# EAGLE board untitled (EAGLE 8.3.0)
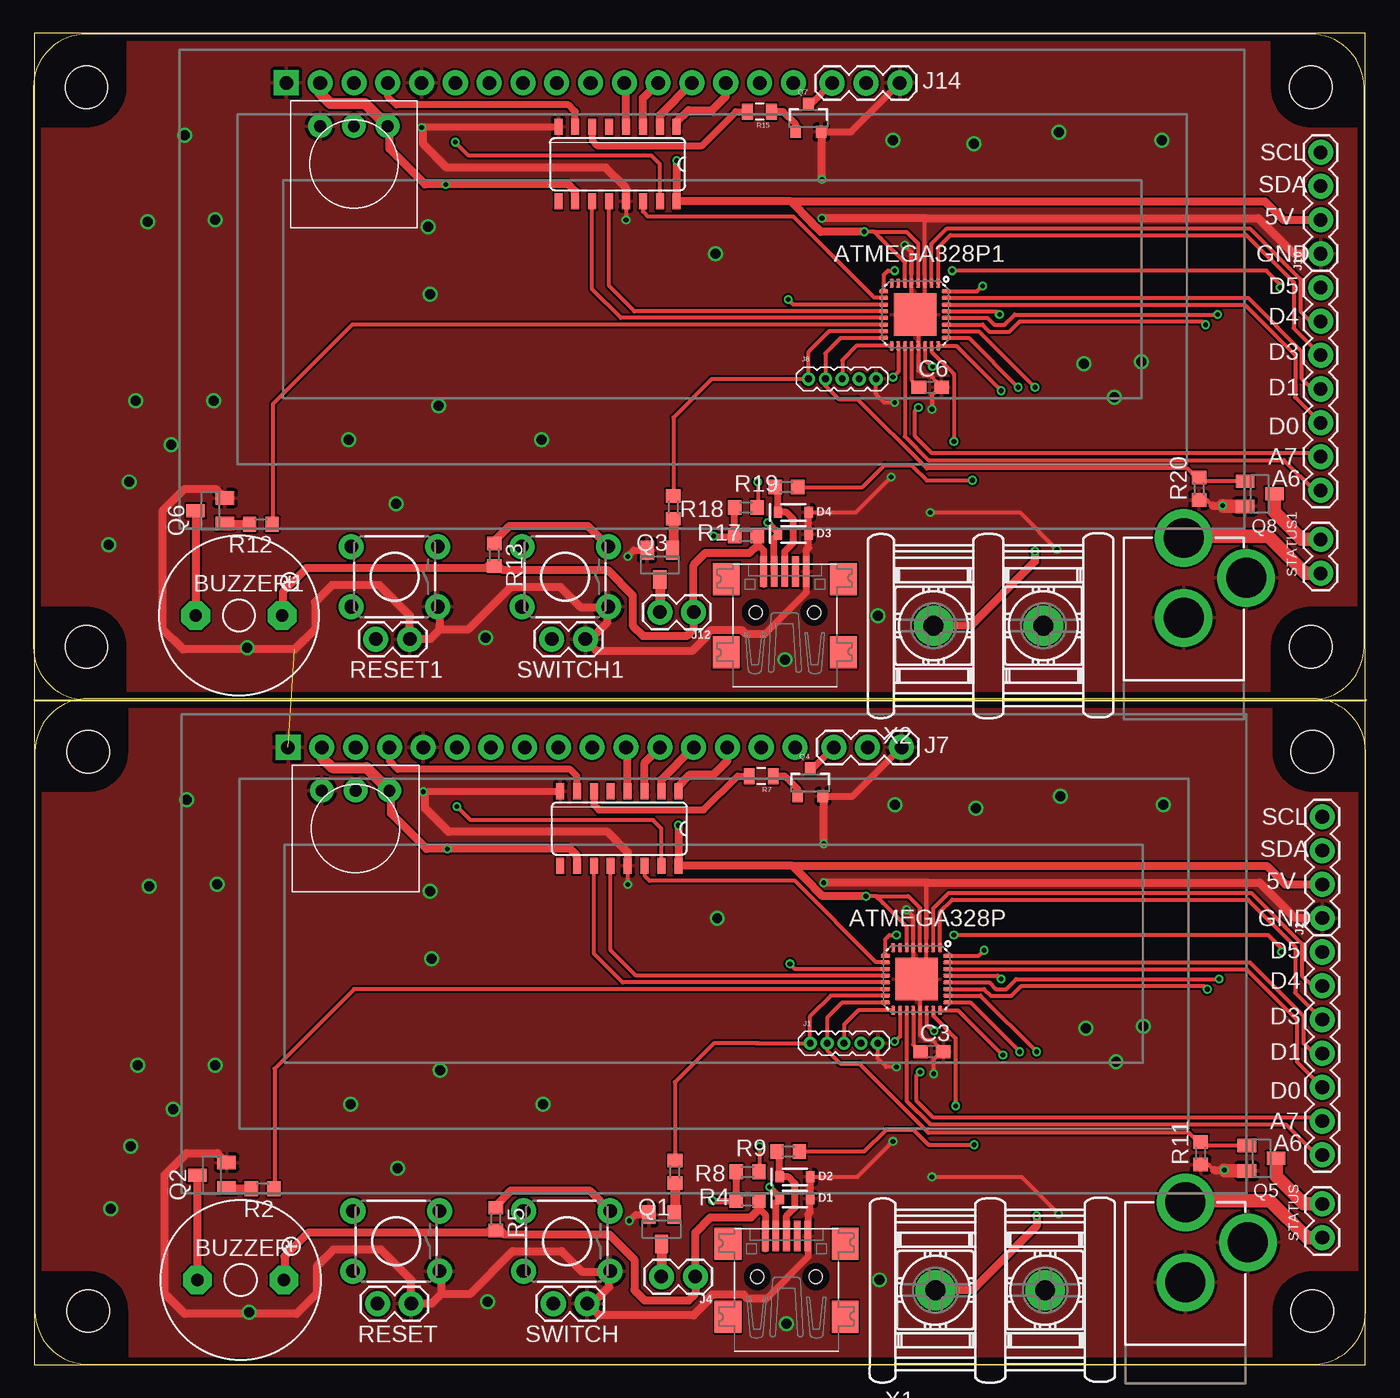
[diagram p0: board, top side]
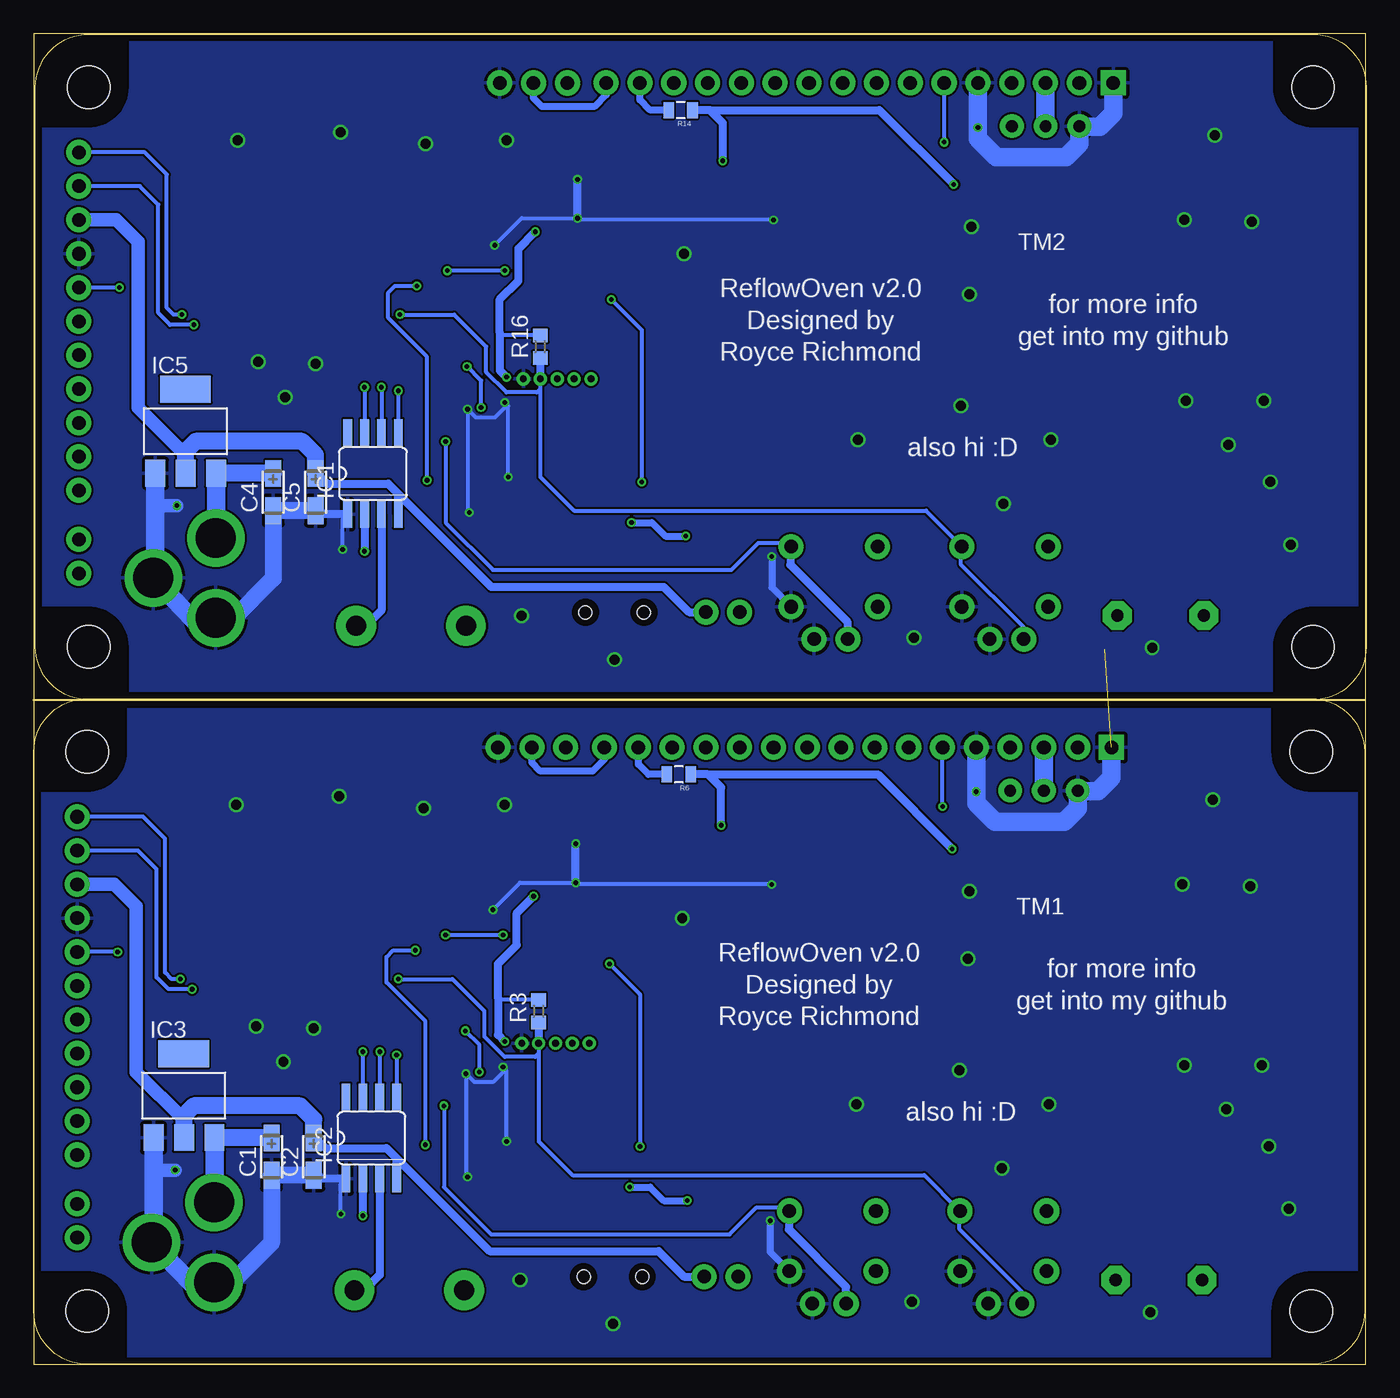
[diagram p1: board, bottom side, seen from below]

Size 100.16 x 100 mm. Coordinates in mm from the lower left corner, seen from the top.
Outline: 0.09,49.91 0.09,100 100.09,100 100.09,0 0.09,0 0.09,49.91
Outline: 0.09,49.91 100.16,49.91
Copper layers (1*16): Top 0.035mm / dielectric 1.6mm / Bottom 0.035mm
Design rules "Elecrow_2-layer_PCB_eagle_rule": minimum track width 6mil, minimum drill 12mil, track to track 6mil, track to pad 6mil, pad to pad 6mil, via to via 8mil, smd to smd 0mil, copper to edge 20mil, drill to drill 10mil, minimum pad ring 6mil, minimum via ring 6mil, stop-mask expansion 0mil, vias tented up to drill 100mil, thermal gap 10mil

## Footprints (pad centres in the part's own frame; a part is rotated, then mirrored left to right if it is on the bottom)
MLF32-PAD = smd 0.7 x 0.3: 1 -2.35,1.75; 2 -2.35,1.25; 3 -2.35,0.75; 4 -2.35,0.25; 5 -2.35,-0.25; 6 -2.35,-0.75; 7 -2.35,-1.25; 8 -2.35,-1.75; 17 2.35,-1.75; 18 2.35,-1.25; 19 2.35,-0.75; 20 2.35,-0.25; 21 2.35,0.25; 22 2.35,0.75; 23 2.35,1.25; 24 2.35,1.75 | smd 0.3 x 0.7: 9 -1.75,-2.35; 10 -1.25,-2.35; 11 -0.75,-2.35; 12 -0.25,-2.35; 13 0.25,-2.35; 14 0.75,-2.35; 15 1.25,-2.35; 16 1.75,-2.35; 25 1.75,2.35; 26 1.25,2.35; 27 0.75,2.35; 28 0.25,2.35; 29 -0.25,2.35; 30 -0.75,2.35; 31 -1.25,2.35; 32 -1.75,2.35 | smd 3.2 x 3.2: PAD 0,0
F/QMBIII = drill 0.914 pad 2.159 octagon: + 3.251,0; - -3.251,0
CT3216 = smd 2 x 1.2: + 1.4,0; - -1.4,0
C0603 = smd 1.1 x 1: 1 -0.85,0; 2 0.85,0
USB-MINIB = smd 0.5 x 2.308: D+ 0,4.064; D- -0.8,4.064; GND 1.6,4.064; ID 0.8,4.064; VBUS -1.6,4.064 | smd 2 x 2.4: GND1 -4.4,-2; GND2 -4.4,3.5; GND3 4.4,3.5; GND4 4.4,-2 | hole 1: -2.2,1; 2.2,1
SOD-323 = smd 0.63 x 0.83: A 1.15,0; C -1.15,0
SO08 = smd 0.66 x 2.032: 1 -1.905,-3.073; 2 -0.635,-3.073; 3 0.635,-3.073; 4 1.905,-3.073; 5 1.905,3.073; 6 0.635,3.073; 7 -0.635,3.073; 8 -1.905,3.073
SOT223 = smd 1.499 x 2.007: 1 -2.261,-3.15; 2 0.025,-3.15; 3 2.311,-3.15 | smd 3.81 x 2.007: 4 0,3.15
SO16 = smd 0.6 x 1.2: 1 -4.445,-2.8; 2 -3.175,-2.8; 3 -1.905,-2.8; 4 -0.635,-2.8; 5 0.635,-2.8; 6 1.905,-2.8; 7 3.175,-2.8; 8 4.445,-2.8; 9 4.445,2.8; 10 3.175,2.8; 11 1.905,2.8; 12 0.635,2.8; 13 -0.635,2.8; 14 -1.905,2.8; 15 -3.175,2.8; 16 -4.445,2.8
1X05-1.27MM = drill 0.508 pad 1: 1 0,0; 2 1.27,0; 3 2.54,0; 4 3.81,0; 5 5.08,0
1X04 = drill 1.016 pad 1.88: 1 0,0; 2 2.54,0; 3 5.08,0; 4 7.62,0
POWER_JACK_PTH = drill 2.997 pad 4.318: GND 0,7.7; GNDBREAK 4.7,10.7; PWR 0,13.7
1X02 = drill 1.016 pad 1.88: 1 0,0; 2 2.54,0
1X03 = drill 1.016 pad 1.88: 1 0,0; 2 2.54,0; 3 5.08,0
1X07 = drill 1.016 pad 1.88: 1 0,0; 2 2.54,0; 3 5.08,0; 4 7.62,0; 5 10.16,0; 6 12.7,0; 7 15.24,0
DP10050_V1 = hole 3.2: -46,-21; 46,-21; 46,21; -46,21
SOT23 = smd 1 x 1.4: 1 -0.95,-1.1; 2 0.95,-1.1; 3 0,1.1
SOT23-3 = smd 0.8 x 0.9: 1 -0.95,-1; 2 0.95,-1; 3 0,1.1
R0603 = smd 1 x 1.1: 1 -0.85,0; 2 0.85,0
0805 = smd 0.8 x 1.2: 1 -0.9,0; 2 0.9,0
TACTILE_SWITCH_PTH_6.0MM = drill 1.016 pad 1.88: 1 -3.251,2.261; 2 3.251,2.261; 3 -3.251,-2.261; 4 3.251,-2.261
TRIM-3386 = drill 0.9 pad 1.778: 1 -2.54,-2.857; 2 0,-2.857; 3 2.54,-2.857
LCD-16X2_NOHOLES = drill 1.016 pad 1.88 square: 1 -32,15.5 | drill 1.016 pad 1.88: 2 -29.46,15.5; 3 -26.92,15.5; 4 -24.38,15.5; 5 -21.84,15.5; 6 -19.3,15.5; 7 -16.76,15.5; 8 -14.22,15.5; 9 -11.68,15.5; 10 -9.14,15.5; 11 -6.6,15.5; 12 -4.06,15.5; 13 -1.52,15.5; 14 1.02,15.5; 15 3.56,15.5; 16 6.1,15.5
5202-02-N-02 = drill 1.5 pad 3: 1 -8.25,0; 2 0,0

## Placement (x,y rotation side)
ATMEGA328P  [MLF32-PAD]  66.38,28.96 270 top
ATMEGA328P1  [MLF32-PAD]  66.26,78.87 270 top
BUZZER  F/QMBIII  [F/QMBIII]  15.58,6.35 0 top
BUZZER1  F/QMBIII  [F/QMBIII]  15.46,56.26 0 top
C1  10uF  [CT3216]  82.26,15.62 90 bottom
C2  10uF  [CT3216]  79.08,15.62 90 bottom
C3  [C0603]  67.53,23.5 0 top
C4  10uF  [CT3216]  82.13,65.53 90 bottom
C5  10uF  [CT3216]  78.96,65.53 90 bottom
C6  [C0603]  67.4,73.41 0 top
CN1  [USB-MINIB]  56.6,5.59 0 top
CN2  [USB-MINIB]  56.48,55.5 0 top
D1  3.6V  [SOD-323]  57.24,12.45 0 top
D2  3.6V  [SOD-323]  57.24,14.1 0 top
D3  3.6V  [SOD-323]  57.11,62.36 0 top
D4  3.6V  [SOD-323]  57.11,64.01 0 top
IC1  MAX6675  [SO08]  74.64,66.93 0 bottom
IC2  MAX6675  [SO08]  74.77,17.02 0 bottom
IC3  REG1117  [SOT223]  88.86,20.19 0 bottom
IC4  74LS595D  [SO16]  44.03,40.26 180 top
IC5  REG1117  [SOT223]  88.73,70.1 0 bottom
IC6  74LS595D  [SO16]  43.9,90.17 180 top
J1  [1X05-1.27MM]  58.38,24.13 0 top
J2  [1X04]  96.86,33.53 90 top
J3  POWER_JACK  [POWER_JACK_PTH]  86.58,-1.52 0 top
J4  [1X02]  49.75,6.6 180 top
J5  [1X02]  25.87,4.57 0 top
J6  [1X02]  39.08,4.57 0 top
J7  [1X03]  65.24,46.35 180 top
J8  [1X05-1.27MM]  58.25,74.04 0 top
J9  [1X07]  96.86,15.75 90 top
J10  [1X04]  96.74,83.44 90 top
J11  POWER_JACK  [POWER_JACK_PTH]  86.45,48.39 0 top
J12  [1X02]  49.62,56.52 180 top
J13  [1X02]  38.95,54.48 0 top
J14  [1X03]  65.11,96.27 180 top
J15  [1X02]  25.74,54.48 0 top
J16  [1X07]  96.74,65.66 90 top
PCB1  PCB_DP_RECTANGLE-50X100  [DP10050_V1]  50.13,25.02 0 top
PCB2  PCB_DP_RECTANGLE-50X100  [DP10050_V1]  50,74.93 0 top
Q1  [SOT23]  47.21,10.16 180 top
Q2  [SOT23]  13.42,14.22 90 top
Q3  [SOT23]  47.08,60.07 180 top
Q4  MMBT2222A  [SOT23-3]  58.38,43.69 0 top
Q5  [SOT23]  92.29,15.49 270 top
Q6  [SOT23]  13.3,64.14 90 top
Q7  MMBT2222A  [SOT23-3]  58.25,93.6 0 top
Q8  [SOT23]  92.16,65.41 270 top
R1  330  [R0603]  48.22,14.48 270 top
R2  330  [R0603]  17.23,13.21 180 top
R3  10k  [R0603]  62.19,26.54 90 bottom
R4  1.5K  [R0603]  53.68,12.32 0 top
R5  10k  [R0603]  34.76,10.92 270 top
R6  330  [0805]  51.65,44.32 180 bottom
R7  1K  [0805]  54.7,44.2 180 top
R8  68  [R0603]  53.68,14.48 180 top
R9  68  [R0603]  56.73,16 180 top
R10  330  [R0603]  48.09,64.39 270 top
R11  10k  [R0603]  87.72,15.88 90 top
R12  330  [R0603]  17.11,63.12 180 top
R13  10k  [R0603]  34.63,60.83 270 top
R14  330  [0805]  51.52,94.23 180 bottom
R15  1K  [0805]  54.57,94.11 180 top
R16  10k  [R0603]  62.06,76.45 90 bottom
R17  1.5K  [R0603]  53.56,62.23 0 top
R18  68  [R0603]  53.56,64.39 180 top
R19  68  [R0603]  56.6,65.91 180 top
R20  10k  [R0603]  87.59,65.79 90 top
RESET  MOMENTARY-SWITCH-SPST-PTH-6.0MM  [TACTILE_SWITCH_PTH_6.0MM]  27.27,9.27 180 top
RESET1  MOMENTARY-SWITCH-SPST-PTH-6.0MM  [TACTILE_SWITCH_PTH_6.0MM]  27.14,59.18 180 top
STATUS  [1X02]  96.86,9.53 90 top
STATUS1  [1X02]  96.74,59.44 90 top
SWITCH  MOMENTARY-SWITCH-SPST-PTH-6.0MM  [TACTILE_SWITCH_PTH_6.0MM]  40.09,9.27 180 top
SWITCH1  MOMENTARY-SWITCH-SPST-PTH-6.0MM  [TACTILE_SWITCH_PTH_6.0MM]  39.97,59.18 180 top
TM1  [TRIM-3386]  24.22,40.26 180 top
TM2  [TRIM-3386]  24.09,90.17 180 top
U1  LCD-16X2NOHOLES  [LCD-16X2_NOHOLES]  51.02,80.77 0 top
U3  LCD-16X2NOHOLES  [LCD-16X2_NOHOLES]  51.14,30.86 0 top
X1  5202-02-N-02  [5202-02-N-02]  76.03,5.59 0 top
X2  5202-02-N-02  [5202-02-N-02]  75.91,55.5 0 top

## Library data of the parts
ATMEGA328P ATMEGA328P1 = SparkFun-DigitalIC
BUZZER BUZZER1 = buzzer; OC_FARNELL: unknown; OC_NEWARK: unknown
C1-C6 CN1 CN2 IC1 IC2 Q5 Q8 R1-R5 R8-R13 R16-R20 TM1 TM2 = adafruit
D1-D4 = SparkFun-DiscreteSemi; PROD_ID: DIO-08199
IC3 IC5 = burr-brown; MPN: REG1117; OC_FARNELL: 1097566; OC_NEWARK: 14P6981
IC4 IC6 = SparkFun-DigitalIC; PROD_ID: IC-07875
J1 J8 = Rheyd
J2 J4-J7 J9 J10 J12-J16 STATUS STATUS1 = SparkFun-Connectors
J3 J11 = SparkFun-Connectors; PROD_ID: CONN-08197
PCB1 PCB2 = dp_devices; PCB_SIZE: DP10050_V1
Q1-Q3 Q6 = semicon-smd-ipc
Q4 Q7 = SparkFun-DiscreteSemi; PROD_ID: TRANS-08049
R6 R7 R14 R15 = SparkFun-Resistors; PROD_ID: RES-11622
RESET RESET1 SWITCH SWITCH1 = SparkFun-Switches; PROD_ID: SWCH-08441; SF_SKU: COM-00097
U1 U3 = SparkFun-Displays
X1 X2 = con-ebyelectro

## Nets
+5V: ATMEGA328P.4 ATMEGA328P.6 ATMEGA328P.18 BUZZER.+ C2.+ CN1.VBUS IC2.4 IC3.2 IC4.10 IC4.16 J2.2 J4.1 R3.2 R4.2 R5.2 R6.1 TM1.1 U3.2
+5V1: ATMEGA328P1.4 ATMEGA328P1.6 ATMEGA328P1.18 BUZZER1.+ C5.+ CN2.VBUS IC1.4 IC5.2 IC6.10 IC6.16 J10.2 J12.1 R13.2 R14.1 R16.2 R17.2 TM2.1 U1.2
+12V: C1.+ IC3.3 J3.PWR STATUS.1
+12V1: C4.+ IC5.3 J11.PWR STATUS1.1
A1: ATMEGA328P1.19 J16.1
A2: ATMEGA328P1.22 J16.2
A6: ATMEGA328P.19 J9.1
A7: ATMEGA328P.22 J9.2
BUZZER: ATMEGA328P.14 R2.1
BUZZER1: ATMEGA328P1.14 R12.1
CLK: ATMEGA328P.24 IC2.5
CLK1: ATMEGA328P1.24 IC1.5
CLOCK: ATMEGA328P.13 IC4.11
CLOCK1: ATMEGA328P1.13 IC6.11
CS: ATMEGA328P.25 IC2.6
CS1: ATMEGA328P1.25 IC1.6
D1: ATMEGA328P1.17 J8.3
D2: ATMEGA328P.32 R9.1
D3: ATMEGA328P.1 J9.5
D4: ATMEGA328P.2 J9.6
D5: ATMEGA328P.9 J9.7
D6: ATMEGA328P1.11 R18.1
D7: ATMEGA328P.11 R8.1
D8: ATMEGA328P1.9 J16.7
D9: ATMEGA328P1.2 J16.6
D10: ATMEGA328P1.1 J16.5
D11: ATMEGA328P1.32 R19.1
D13: ATMEGA328P.17 J1.3
DATA: ATMEGA328P.10 IC4.14
DATA1: ATMEGA328P1.10 IC6.14
GND: ATMEGA328P1.3 ATMEGA328P1.5 ATMEGA328P1.21 ATMEGA328P1.PAD ATMEGA328P.3 ATMEGA328P.5 ATMEGA328P.21 ATMEGA328P.PAD C1.- C2.- C3.2 C4.- C5.- C6.2 CN1.GND CN2.GND D1.A D2.A D3.A D4.A IC1.1 IC2.1 IC3.1 IC4.8 IC4.13 IC5.1 IC6.8 IC6.13 J1.5 J2.1 J3.GND J3.GNDBREAK J5.2 J6.2 J7.1 J8.5 J10.1 J11.GND J11.GNDBREAK J13.2 J14.1 J15.2 Q1.2 Q2.2 Q3.2 Q4.2 Q5.2 Q6.2 Q7.2 Q8.2 R11.1 R20.1 RESET1.1 RESET.1 SWITCH1.1 SWITCH.1 TM1.3 TM2.3 U1.1 U1.5 U3.1 U3.5
LATCH: ATMEGA328P.12 IC4.12
LATCH1: ATMEGA328P1.12 IC6.12
N$1: BUZZER.- Q2.3
N$2: IC2.2 X1.1
N$3: IC2.3 X1.2
N$4: Q1.1 R1.2
N$5: Q2.1 R2.2
N$6: ATMEGA328P.20 C3.1
N$7: J4.2 Q1.3
N$8: R6.2 U3.15
N$9: TM1.2 U3.3
N$10: IC4.7 U3.4
N$11: IC4.15 U3.6
N$12: IC4.4 U3.11
N$13: IC4.3 U3.12
N$14: IC4.2 U3.13
N$15: IC4.1 U3.14
N$16: J7.2 U3.16
N$17: J7.3 Q4.3
N$18: Q4.1 R7.1
N$19: IC4.6 R7.2
N$20: CN1.D- D1.C R4.1 R8.2
N$21: CN1.D+ D2.C R9.2
N$22: BUZZER1.- Q6.3
N$23: IC1.2 X2.1
N$24: Q5.3 STATUS.2
N$25: IC1.3 X2.2
N$26: Q3.1 R10.2
N$27: Q6.1 R12.2
N$28: J12.2 Q3.3
N$29: R14.2 U1.15
N$30: TM2.2 U1.3
N$31: IC6.7 U1.4
N$32: IC6.15 U1.6
N$33: IC6.4 U1.11
N$34: IC6.3 U1.12
N$35: IC6.2 U1.13
N$36: IC6.1 U1.14
N$37: J14.2 U1.16
N$38: J14.3 Q7.3
N$39: Q7.1 R15.1
N$40: IC6.6 R15.2
N$41: ATMEGA328P1.20 C6.1
N$42: CN2.D- D3.C R17.1 R18.2
N$43: CN2.D+ D4.C R19.2
N$44: Q8.3 STATUS1.2
RESET: ATMEGA328P.29 J1.4 J5.1 R3.1 RESET.3
RESET1: ATMEGA328P1.29 J8.4 J15.1 R16.1 RESET1.3
RXD: ATMEGA328P.30 J9.3
RXD1: ATMEGA328P1.30 J16.3
SCL: ATMEGA328P.28 J2.4
SCL1: ATMEGA328P1.28 J10.4
SDA: ATMEGA328P.27 J2.3
SDA1: ATMEGA328P1.27 J10.3
SO: ATMEGA328P.26 IC2.7
SO1: ATMEGA328P1.26 IC1.7
SSR: ATMEGA328P.15 J1.1 R1.1
SSR1: ATMEGA328P1.15 J8.1 R10.1
STATUS: ATMEGA328P.16 J1.2 Q5.1 R11.2
STATUS1: ATMEGA328P1.16 J8.2 Q8.1 R20.2
SWITCH: ATMEGA328P.23 J6.1 R5.1 SWITCH.3
SWITCH1: ATMEGA328P1.23 J13.1 R13.1 SWITCH1.3
TXD: ATMEGA328P.31 J9.4
TXD1: ATMEGA328P1.31 J16.4

## Tracks (layer width: path | path; a pad name or v marks a point on that pad's centre or on a via)
+5V  (via drill 0.35)
  Top 0.305: 63.32,35.18 65.75,35.18 66.63,34.29 ATMEGA328P.4 | 63.32,35.18 v62.57,35.18 | ATMEGA328P.6 65.63,32.88 63.84,34.67 63.83,34.67 63.32,35.18 | ATMEGA328P.18 65.13,24.66 v64.73,24.26 | 57.49,36.96 57.49,37.03 57.06,37.46
  Top 0.508: R4.2 54.57,12.28 54.57,11.68 55,11.25 CN1.VBUS 55,8.69 | 49.96,6.6 49.75,6.39
  Top 0.61: IC4.10 40.86,38.23 40.35,38.73 v31.12,38.73 29.55,38.73 26.89,41.4 26.89,42.99 TM1.1 | v48.48,40.51 IC4.16 57.06,37.46 | 57.06,37.46 92.68,37.46 94.07,36.07 J2.2 | BUZZER.+ 18.88,6.4 18.88,8.13 20.66,9.91 34.12,9.91 34.29,10.07 R5.2 35.1,10.07 35.39,9.78 43.27,9.78 45.17,7.87 45.17,5.59 45.94,4.83 49.24,4.83 49.75,5.33 49.75,6.39 J4.1 49.75,9.91 50.89,11.05 53.94,11.05 54.57,11.68 | 57.06,37.46 58.61,35.91 58.61,35.87 59.3,35.18 v62.57,35.18
  Top 0.813: U3.2 21.68,45.59 22.44,44.83 25.04,44.83 TM1.1
  Bottom 0.305: R3.2 65.05,27.39 65.24,27.58
  Bottom 0.61: 49.45,44.32 R6.1 | 49.45,44.32 36.71,44.32 v31.12,38.73 | v48.48,40.51 48.48,43.35 49.45,44.32 | 72.86,15.24 IC2.4 72.86,15.49 | C2.+ 78.7,16.64 78.58,16.64 78.19,16.26 73.62,16.26 72.86,15.49 | v64.73,24.26 65.24,24.77 65.24,27.58 65.24,30.1 63.84,31.5 63.84,33.91 v62.57,35.18 | 72.86,15.49 65.88,8.51 53.17,8.51 51.27,6.6 J4.1
  Bottom 1.016: IC3.2 88.84,18.39 92.42,21.97 92.42,34.42 94.07,36.07 J2.2
  Bottom 1.27: C2.+ 79.08,18.41 80.1,19.43 88.1,19.43 88.86,18.67 88.86,17.07 IC3.2
+5V1  (via drill 0.35)
  Top 0.305: 63.2,85.09 65.62,85.09 66.51,84.2 ATMEGA328P1.4 | 63.2,85.09 v62.45,85.09 | ATMEGA328P1.6 65.51,82.79 63.72,84.58 63.7,84.58 63.2,85.09 | ATMEGA328P1.18 65.01,74.57 v64.61,74.17 | 57.37,86.87 57.37,86.94 56.93,87.37
  Top 0.508: R17.2 54.45,62.19 54.45,61.59 54.88,61.16 CN2.VBUS 54.88,58.6 | 49.83,56.52 49.62,56.3
  Top 0.61: IC6.10 40.73,88.14 40.22,88.65 v30.99,88.65 29.43,88.65 26.76,91.31 26.76,92.9 TM2.1 | v48.35,90.42 IC6.16 56.93,87.37 | 56.93,87.37 92.55,87.37 93.94,85.98 J10.2 | BUZZER1.+ 18.76,56.31 18.76,58.04 20.54,59.82 34,59.82 34.16,59.98 R13.2 34.98,59.98 35.27,59.69 43.14,59.69 45.05,57.78 45.05,55.5 45.81,54.74 49.11,54.74 49.62,55.24 49.62,56.3 J12.1 49.62,60.07 50.51,60.96 53.81,60.96 54.45,61.59 | 56.93,87.37 58.49,85.82 58.49,85.78 59.18,85.09 v62.45,85.09
  Top 0.813: U1.2 21.56,95.5 22.31,94.74 24.92,94.74 TM2.1
  Bottom 0.305: R16.2 64.92,77.3 65.11,77.49
  Bottom 0.61: 49.32,94.23 R14.1 | 49.32,94.23 36.58,94.23 v30.99,88.65 | v48.35,90.42 48.35,93.26 49.32,94.23 | 72.73,65.15 IC1.4 72.73,65.41 | C5.+ 78.57,66.55 78.45,66.55 78.07,66.17 73.5,66.17 72.73,65.41 | v64.61,74.17 65.11,74.68 65.11,77.49 65.11,80.01 63.72,81.41 63.72,83.82 v62.45,85.09 | 72.73,65.41 65.75,58.42 52.79,58.42 50.89,56.52 J12.1
  Bottom 1.016: IC5.2 88.71,68.3 92.29,71.88 92.29,84.33 93.94,85.98 J10.2
  Bottom 1.27: C5.+ 78.96,68.33 79.97,69.34 87.97,69.34 88.73,68.58 88.73,66.98 IC5.2
+12V
  Top 1.016: STATUS.1 95.72,9.53 92.93,12.32 86.85,12.32 J3.PWR
  Bottom 1.27: C1.+ 86.53,17.02 IC3.3
  Bottom 1.397: IC3.3 86.55,12.07 J3.PWR
+12V1
  Top 1.016: STATUS1.1 95.59,59.44 92.8,62.23 86.72,62.23 J11.PWR
  Bottom 1.27: C4.+ 86.4,66.93 IC5.3
  Bottom 1.397: IC5.3 86.42,61.98 J11.PWR
A1
  Top 0.305: J16.1 96.27,65.66 93.98,67.94 67.27,67.94 65.49,69.72 65.49,76.5 ATMEGA328P1.19
A2  (via drill 0.35)
  Top 0.305: J16.2 96.74,68.33 96.61,68.45 67.53,68.45 66.26,69.72 66.26,71.63 v66.51,71.88 | v67.57,74.98 67.48,74.98 67.01,75.45 ATMEGA328P1.22
  Bottom 0.305: v66.51,71.88 66.51,73.91 v67.57,74.98
A6
  Top 0.305: J9.1 96.39,15.75 94.11,18.03 67.4,18.03 65.62,19.81 65.62,26.59 ATMEGA328P.19
A7  (via drill 0.35)
  Top 0.305: J9.2 96.86,18.41 96.74,18.54 67.65,18.54 66.38,19.81 66.38,21.72 v66.64,21.97 | v67.7,25.07 67.61,25.07 67.13,25.54 ATMEGA328P.22
  Bottom 0.305: v66.64,21.97 66.64,24 v67.7,25.07
BUZZER
  Top 0.305: ATMEGA328P.14 24.1,28.21 18.12,22.23 18.12,13.25 R2.1
BUZZER1
  Top 0.305: ATMEGA328P1.14 23.98,78.12 18,72.14 18,63.16 R12.1
CLK  (via drill 0.35)
  Top 0.305: ATMEGA328P.24 69.5,26.61 v72.86,23.24
  Bottom 0.305: v72.86,23.24 IC2.5
CLK1  (via drill 0.35)
  Top 0.305: ATMEGA328P1.24 69.37,76.52 v72.73,73.15
  Bottom 0.305: v72.73,73.15 IC1.5
CLOCK
  Top 0.305: ATMEGA328P.13 44.28,28.71 42.13,30.86 IC4.11
CLOCK1
  Top 0.305: ATMEGA328P1.13 44.15,78.62 42,80.77 IC6.11
CS  (via drill 0.35)
  Top 0.305: ATMEGA328P.25 70.42,27.21 v74.13,23.5
  Bottom 0.305: v74.13,23.5 IC2.6
CS1  (via drill 0.35)
  Top 0.305: ATMEGA328P1.25 70.29,77.12 v74,73.41
  Bottom 0.305: v74,73.41 IC1.6
D1
  Top 0.305: ATMEGA328P1.17 61.87,76.52 60.8,75.44 J8.3
D2  (via drill 0.35)
  Top 0.305: ATMEGA328P.32 71.05,30.71 v71.46,31.11 | R9.1 62.45,16 64.1,17.65 66.13,17.65 67.27,16.51 v70.7,16.51
  Bottom 0.305: v70.7,16.51 70.7,25.78 73.62,28.7 73.62,30.61 73.11,31.11 v71.46,31.11
D3
  Top 0.305: ATMEGA328P.1 68.13,34.01 69.05,34.92 91.28,34.92 94.83,31.37 94.83,27.94 J9.5 96.48,25.91
D4
  Top 0.305: ATMEGA328P.2 67.63,34.27 68.8,35.43 91.53,35.43 95.34,31.62 95.34,29.21 96.1,28.45 J9.6
D5  (via drill 0.35)
  Top 0.305: ATMEGA328P.9 64.03,31.94 64.35,32.26 v64.86,32.26 | v93.81,30.99 93.81,31.24 92.8,32.26 v69.18,32.26
  Bottom 0.305: v64.86,32.26 v69.18,32.26 | v93.81,30.99 J9.7
D6  (via drill 0.35)
  Top 0.305: ATMEGA328P1.11 57.12,79.62 v56.73,80.01 | v54.45,66.29 54.45,64.43 R18.1
  Bottom 0.305: v54.45,66.29 54.45,77.72 v56.73,80.01
D7  (via drill 0.35)
  Top 0.305: ATMEGA328P.11 57.25,29.71 v56.86,30.1 | v54.57,16.38 54.57,14.52 R8.1
  Bottom 0.305: v54.57,16.38 54.57,27.81 v56.86,30.1
D8  (via drill 0.35)
  Top 0.305: ATMEGA328P1.9 63.91,81.85 64.22,82.17 v64.73,82.17 | v93.69,80.9 93.69,81.15 92.67,82.17 v69.05,82.17
  Bottom 0.305: v64.73,82.17 v69.05,82.17 | v93.69,80.9 J16.7
D9
  Top 0.305: ATMEGA328P1.2 67.51,84.18 68.67,85.34 91.4,85.34 95.21,81.53 95.21,79.12 95.97,78.36 J16.6
D10
  Top 0.305: ATMEGA328P1.1 68.01,83.92 68.92,84.84 91.15,84.84 94.7,81.28 94.7,77.85 J16.5 96.36,75.82
D11  (via drill 0.35)
  Top 0.305: ATMEGA328P1.32 70.93,80.62 v71.34,81.03 | R19.1 62.32,65.91 63.97,67.56 66,67.56 67.14,66.42 v70.57,66.42
  Bottom 0.305: v70.57,66.42 70.57,75.69 73.5,78.61 73.5,80.52 72.99,81.03 v71.34,81.03
D13
  Top 0.305: ATMEGA328P.17 62,26.61 60.92,25.53 J1.3
DATA
  Top 0.305: IC4.14 45.94,36.7 46.32,36.32 57.24,36.32 63.34,30.23 64.01,30.23 ATMEGA328P.10
DATA1
  Top 0.305: IC6.14 45.81,86.61 46.19,86.23 57.11,86.23 63.21,80.14 63.89,80.14 ATMEGA328P1.10
GND  (via drill 0.35, 0.75)  (1 unrouted)
  Top 0.305: 66.63,28.71 ATMEGA328P.21 66.63,24.77 67.02,24.38 67.53,24.38 68.03,23.88 68.03,23.84 68.32,23.55 | 66.63,28.71 ATMEGA328P.PAD 66.13,29.21 ATMEGA328P.5 66.13,33.65 v65.62,34.16 | 66.63,28.71 67.13,29.21 ATMEGA328P.3 67.13,36.15 67.18,36.2 | 68.32,23.55 C3.2 | v67.65,21.84 67.65,22.89 68.32,23.55 | IC4.13 v44.67,36.07 | v64.86,22.35 64.1,22.35 63.46,22.99 J1.5 | R11.1 88.31,15.03 88.73,14.61 | D2.A 61.94,14.1 v64.61,16.76 | v67.53,14.1 74.26,14.1 v77.05,11.3 | 66.51,78.62 ATMEGA328P1.21 66.51,74.68 66.89,74.3 67.4,74.3 67.91,73.79 67.91,73.75 68.19,73.46 | 66.51,78.62 ATMEGA328P1.PAD 66.01,79.12 ATMEGA328P1.5 66.01,83.56 v65.49,84.07 | 66.51,78.62 67.01,79.12 ATMEGA328P1.3 67.01,86.06 67.05,86.11 | 68.19,73.46 C6.2 | v67.53,71.75 67.53,72.8 68.19,73.46 | IC6.13 v44.54,85.98 | v64.73,72.26 63.97,72.26 63.34,72.9 J8.5 | R20.1 88.19,64.94 88.61,64.52 | D4.A 61.81,64.01 v64.48,66.67 | v67.4,64.01 74.13,64.01 v76.92,61.21
  Top 0.508: IC4.8 29.34,43.06 v29.3,43.02 | Q4.2 61.57,42.69 J7.1 | D2.A D1.A 58.38,11.43 58.2,11.25 CN1.GND 58.2,8.08 55.08,4.95 | Q1.2 45.26,11.26 v44.79,10.79 | IC6.8 29.21,92.97 v29.18,92.93 | Q7.2 61.45,92.6 J14.1 | D4.A D3.A 58.25,61.34 58.08,61.16 CN2.GND 58.08,57.99 54.95,54.86 | Q3.2 45.13,61.17 v44.67,60.71
  Top 0.61: 88.73,14.61 v89.5,14.61 | IC4.13 44.67,38.48 43.14,40.01 31.2,40.01 29.43,41.78 29.43,42.98 29.34,43.06 | J2.1 94.83,33.53 92.16,36.2 67.18,36.2 v59.4,36.2 | v59.4,39.12 59.4,42.62 Q4.2 | 30.7,5.33 29.93,4.57 J5.2 28.41,6.35 26.12,8.64 22.57,8.64 21.3,7.37 21.3,5.33 19.77,3.81 11.39,3.81 9.87,5.33 9.87,14.22 11.52,15.88 13.82,15.88 Q2.2 | 30.7,5.33 30.7,6.83 RESET.1 | 30.7,5.33 32.85,5.33 36.03,8.51 39.71,8.51 41.24,6.99 43.32,6.99 SWITCH.1 43.27,6.93 43.27,5.84 42,4.57 J6.2 42.51,3.68 49.62,3.68 50.75,4.81 50.75,4.98 51.02,5.25 53.39,5.25 53.69,4.95 55.08,4.95 | 88.61,64.52 v89.37,64.52 | IC6.13 44.54,88.39 43.02,89.92 31.08,89.92 29.3,91.69 29.3,92.89 29.21,92.97 | J10.1 94.7,83.44 92.04,86.11 67.05,86.11 v59.27,86.11 | v59.27,89.03 59.27,92.53 Q7.2 | 30.57,55.24 29.81,54.48 J15.2 28.28,56.26 26,58.55 22.44,58.55 21.17,57.28 21.17,55.24 19.65,53.72 11.26,53.72 9.74,55.24 9.74,64.14 11.39,65.79 13.7,65.79 Q6.2 | 30.57,55.24 30.57,56.74 RESET1.1 | 30.57,55.24 32.73,55.24 35.9,58.42 39.59,58.42 41.11,56.9 43.19,56.9 SWITCH1.1 43.14,56.84 43.14,55.75 41.87,54.48 J13.2 42.38,53.59 49.49,53.59 50.62,54.72 50.62,54.89 50.89,55.16 53.27,55.16 53.56,54.86 54.95,54.86
  Top 1.016: Q5.2 89.56,14.54 v89.5,14.61 | Q8.2 89.43,64.45 v89.37,64.52
  Bottom 0.305: v65.62,34.16 63.59,36.2 v59.4,36.2 59.27,36.07 v44.67,36.07 | v64.61,16.76 64.61,22.1 v64.86,22.35 64.86,21.97 65.62,21.21 67.02,21.21 v67.65,21.84 67.65,14.22 v67.53,14.1 | v77.05,11.3 77.05,13.56 IC2.1 | v65.49,84.07 63.46,86.11 v59.27,86.11 59.14,85.98 v44.54,85.98 | v64.48,66.67 64.48,72.01 v64.73,72.26 64.73,71.88 65.49,71.12 66.89,71.12 v67.53,71.75 67.53,64.14 v67.4,64.01 | v76.92,61.21 76.92,63.48 IC1.1
  Bottom 0.508: v44.79,10.79 44.79,8.46 SWITCH.1 | v44.67,60.71 44.67,58.37 SWITCH1.1
  Bottom 0.61: v59.4,36.2 v59.4,39.12 | IC2.1 78.81,13.95 C2.- | v59.27,86.11 v59.27,89.03 | IC1.1 78.68,63.86 C5.-
  Bottom 1.016: v89.5,14.61 90.95,14.61 91.12,14.43 | v89.37,64.52 90.82,64.52 91,64.34
  Bottom 1.27: C2.- C1.- 82.26,9.14 85.43,5.97 86.5,5.97 J3.GND | C5.- C4.- 82.13,59.05 85.31,55.88 86.37,55.88 J11.GND
  Bottom 1.397: U3.5 v29.3,43.02 29.3,42.17 27.9,40.77 22.7,40.77 21.68,41.78 TM1.3 21.61,43.05 20.15,43.05 19.14,44.06 U3.1 | IC3.1 91.12,14.43 91.12,9.2 J3.GNDBREAK 88.28,6.05 J3.GND | U1.5 v29.18,92.93 29.18,92.08 27.77,90.68 22.57,90.68 21.55,91.69 TM2.3 21.49,92.96 20.03,92.96 19.02,93.98 U1.1 | IC5.1 91,64.34 91,59.11 J11.GNDBREAK 88.15,55.96 J11.GND
  other vias: 8.72,35.94 13.8,36.07 11.52,42.42 7.84,22.48 13.68,22.48 10.5,19.18 23.84,19.56 38.32,19.56 51.4,33.53 29.81,35.56 29.93,30.48 30.57,22.1 64.73,42.04 77.18,42.67 84.92,42.04 70.83,41.78 79.08,25.27 83.4,25.4 81.37,22.73 5.8,11.68 7.33,16.38 27.39,14.73 34.12,4.7 16.22,3.94 63.59,6.35 56.6,3.05 8.6,85.85 13.68,85.98 11.39,92.33 7.71,72.39 13.55,72.39 10.38,69.09 23.71,69.47 38.19,69.47 51.27,83.44 29.68,85.47 29.81,80.39 30.44,72.01 64.61,91.95 77.05,92.58 84.8,91.95 70.7,91.69 78.96,75.18 83.27,75.31 81.24,72.64 5.68,61.59 7.2,66.29 27.27,64.64 34,54.61 16.09,53.85 63.46,56.26 56.48,52.96
  pour Top: 0.09,100.08 100.16,100.08 100.16,0 0.09,0 0.09,89.28 0.09,95.38
  pour Bottom: -3.21,103.5 104.1,103.5 104.1,-5.84 -3.21,-5.84
LATCH
  Top 0.305: ATMEGA328P.12 45.3,29.21 43.4,31.11 IC4.12
LATCH1
  Top 0.305: ATMEGA328P1.12 45.18,79.12 43.27,81.03 IC6.12
N$1
  Top 0.61: Q2.3 BUZZER.-
N$2  (via drill 0.35)
  Top 0.61: v75.4,11.18 75.4,10.41 70.57,5.59 X1.1
  Bottom 0.61: IC2.2 v75.4,11.18
N$3
  Bottom 0.61: IC2.3 74.13,6.73 75.27,5.59 X1.2
N$4
  Top 0.762: R1.2 48.22,11.33 Q1.1
N$5
  Top 0.61: R2.2 14.59,13.21 Q2.1
N$6
  Top 0.305: ATMEGA328P.20 66.13,24.04 C3.1
N$7
  Top 0.762: Q1.3 J4.2
N$8
  Bottom 0.508: R6.2 53.94,44.32 54.7,45.09 U3.15
N$9
  Bottom 1.397: TM1.2 U3.3
N$10
  Top 0.508: IC4.7 40.86,44.2 40.35,44.7 27.39,44.7 26.76,45.34 U3.4
N$11  (via drill 0.35)
  Top 0.305: IC4.15 47.21,40.26 46.57,40.89 32.85,40.89 v31.84,41.91
  Bottom 0.305: v31.84,41.91 U3.6
N$12
  Top 0.61: IC4.4 44.67,46.24 U3.11
N$13
  Top 0.61: IC4.3 45.94,45.21 U3.12
N$14
  Top 0.61: IC4.2 47.21,43.94 U3.13
N$15
  Top 0.61: IC4.1 48.48,43.43 49.37,44.32 51.14,44.32 52.16,45.34 U3.14
N$16
  Bottom 0.508: U3.16 57.24,45.46 58.13,44.58 62.06,44.58 62.7,45.21 J7.2
N$17
  Top 0.508: Q4.3 58.59,44.79 J7.3
N$18
  Top 0.508: Q4.1 57.43,43.24 56.48,44.2 R7.1
N$19
  Top 0.508: IC4.6 42.13,42.04 42.51,41.66 50.38,41.66 52.92,44.2 R7.2
N$20  (via drill 0.35)
  Top 0.508: CN1.D- 55.8,12.16 D1.C 56.09,12.58 v55.33,13.34 | R8.2 R4.1 52.79,12.28 v51.02,12.32
  Bottom 0.508: v55.33,13.34 53.81,13.34 52.79,12.32 v51.02,12.32
N$21
  Top 0.508: CN1.D+ 56.6,11.18 57.24,11.81 57.24,13.59 56.73,14.1 D2.C 56.09,15.79 R9.2
N$22
  Top 0.61: Q6.3 12.2,56.27 BUZZER1.-
N$23  (via drill 0.35)
  Top 0.61: v75.27,61.09 75.27,60.33 70.45,55.5 X2.1
  Bottom 0.61: IC1.2 v75.27,61.09
N$24
  Top 1.016: Q5.3 93.39,14.14 95.47,12.06 STATUS.2
N$25
  Bottom 0.61: IC1.3 74,56.64 75.15,55.5 X2.2
N$26
  Top 0.762: R10.2 48.09,61.24 Q3.1
N$27
  Top 0.61: R12.2 14.46,63.12 Q6.1
N$28
  Top 0.762: Q3.3 J12.2
N$29
  Bottom 0.508: R14.2 53.81,94.23 54.57,95 U1.15
N$30
  Bottom 1.397: TM2.2 U1.3
N$31
  Top 0.508: IC6.7 40.73,94.11 40.22,94.61 27.27,94.61 26.63,95.25 U1.4
N$32  (via drill 0.35)
  Top 0.305: IC6.15 47.08,90.17 46.44,90.81 32.73,90.81 v31.71,91.82
  Bottom 0.305: v31.71,91.82 U1.6
N$33
  Top 0.61: IC6.4 44.54,96.15 U1.11
N$34
  Top 0.61: IC6.3 45.81,95.12 U1.12
N$35
  Top 0.61: IC6.2 47.08,93.86 U1.13
N$36
  Top 0.61: IC6.1 48.35,93.34 49.24,94.23 51.02,94.23 52.03,95.25 U1.14
N$37
  Bottom 0.508: U1.16 57.12,95.37 58,94.49 61.94,94.49 62.57,95.12 J14.2
N$38
  Top 0.508: Q7.3 58.47,94.7 J14.3
N$39
  Top 0.508: Q7.1 57.3,93.15 56.35,94.11 R15.1
N$40
  Top 0.508: IC6.6 42,91.95 42.38,91.57 50.25,91.57 52.79,94.11 R15.2
N$41
  Top 0.305: ATMEGA328P1.20 66.01,73.95 C6.1
N$42  (via drill 0.35)
  Top 0.508: CN2.D- 55.68,62.07 D3.C 55.96,62.49 v55.21,63.25 | R18.2 R17.1 52.67,62.19 v51.14,62.23
  Bottom 0.508: v55.21,63.25 53.68,63.25 52.67,62.23 v51.14,62.23
N$43
  Top 0.508: CN2.D+ 56.48,61.09 57.11,61.72 57.11,63.5 56.6,64.01 D4.C 55.96,65.7 R19.2
N$44
  Top 1.016: Q8.3 93.26,64.05 95.34,61.98 STATUS1.2
RESET  (via drill 0.35)
  Top 0.305: ATMEGA328P.29 72.48,29.21 v72.73,28.96
  Bottom 0.305: v72.73,28.96 68.67,28.96 66.26,26.54 66.26,24.64 64.73,23.11 62.45,23.11 62.19,23.37 | J1.4 62.19,23.37 | 62.19,23.37 62.19,16.76 59.65,14.22 33.21,14.22 RESET.3 30.57,11.48 30.57,10.16 25.87,5.46 J5.1
  Bottom 0.61: R3.1 J1.4
RESET1  (via drill 0.35)
  Top 0.305: ATMEGA328P1.29 72.36,79.12 v72.61,78.87
  Bottom 0.305: v72.61,78.87 68.54,78.87 66.13,76.45 66.13,74.55 64.61,73.03 62.32,73.03 62.06,73.28 | J8.4 62.06,73.28 | 62.06,73.28 62.06,66.67 59.52,64.14 33.08,64.14 RESET1.3 30.44,61.39 30.44,60.07 25.74,55.37 J15.1
  Bottom 0.61: R16.1 J8.4
RXD
  Top 0.305: ATMEGA328P.30 91.16,29.71 94.96,25.91 94.96,22.73 J9.3
RXD1
  Top 0.305: ATMEGA328P1.30 91.03,79.62 94.83,75.82 94.83,72.64 J16.3
SCL  (via drill 0.35)
  Top 0.305: ATMEGA328P.28 71.84,28.71 72.35,28.19 73.11,28.19 73.88,28.96 v89.12,28.96
  Bottom 0.305: v89.12,28.96 89.75,28.96 90.26,29.46 90.26,39.5 91.91,41.15 J2.4
SCL1  (via drill 0.35)
  Top 0.305: ATMEGA328P1.28 71.71,78.62 72.22,78.11 72.99,78.11 73.75,78.87 v88.99,78.87
  Bottom 0.305: v88.99,78.87 89.62,78.87 90.13,79.38 90.13,89.41 91.78,91.06 J10.4
SDA  (via drill 0.35)
  Top 0.305: ATMEGA328P.27 71.45,28.21 71.97,27.69 73.5,27.69 74.26,28.45 87.97,28.45 v88.23,28.19
  Bottom 0.305: v88.23,28.19 90,28.19 90.89,29.08 90.89,37.21 92.29,38.61 J2.3
SDA1  (via drill 0.35)
  Top 0.305: ATMEGA328P1.27 71.32,78.12 71.84,77.6 73.37,77.6 74.13,78.36 87.85,78.36 v88.1,78.11
  Bottom 0.305: v88.1,78.11 89.88,78.11 90.77,78.99 90.77,87.12 92.16,88.52 J10.3
SO  (via drill 0.35)
  Top 0.305: ATMEGA328P.26 71.19,27.71 v75.4,23.5
  Bottom 0.305: v75.4,23.5 IC2.7
SO1  (via drill 0.35)
  Top 0.305: ATMEGA328P1.26 71.06,77.62 v75.27,73.41
  Bottom 0.305: v75.27,73.41 IC1.7
SSR
  Top 0.305: ATMEGA328P.15 59.93,27.71 58.38,26.16 58.38,24.24 | 58.38,24.24 J1.1 | 54.32,24.13 54.57,24.13 | 54.57,24.13 58.27,24.13 58.38,24.24 | 54.57,24.13 51.14,24.13 48.22,21.21 R1.1
SSR1
  Top 0.305: ATMEGA328P1.15 59.8,77.62 58.25,76.07 58.25,74.15 | 58.25,74.15 J8.1 | 58.25,74.15 58.15,74.04 51.02,74.04 48.09,71.12 R10.1
STATUS
  Top 0.305: ATMEGA328P.16 60.82,27.21 59.65,26.04 J1.2 59.65,23.62 60.67,22.61 62.06,22.61 67.27,17.4 86.83,17.4 87.5,16.73 R11.2 88,16.44 Q5.1
STATUS1
  Top 0.305: ATMEGA328P1.16 60.7,77.12 59.52,75.95 J8.2 59.52,73.53 60.54,72.52 61.94,72.52 67.14,67.31 86.7,67.31 87.38,66.64 R20.2 87.87,66.36 Q8.1
SWITCH  (via drill 0.35)
  Top 0.305: ATMEGA328P.23 67.63,26.18 69.3,24.51 v69.3,19.43
  Top 0.61: R5.1 34.76,11.94 35.9,13.08 41.8,13.08 SWITCH.3
  Bottom 0.305: v69.3,19.43 69.3,13.34 65.75,9.78 47.84,9.78 45.81,11.81 43.73,11.81 43.4,11.48
  Bottom 0.61: J6.1 39.08,5.84 43.4,10.16 43.4,11.48 SWITCH.3
SWITCH1  (via drill 0.35)
  Top 0.305: ATMEGA328P1.23 67.51,76.09 69.18,74.42 v69.18,69.34
  Top 0.61: R13.1 34.63,61.85 35.78,62.99 41.67,62.99 SWITCH1.3
  Bottom 0.305: v69.18,69.34 69.18,63.25 65.62,59.69 47.71,59.69 45.68,61.72 43.6,61.72 43.27,61.39
  Bottom 0.61: J13.1 38.95,55.75 43.27,60.07 43.27,61.39 SWITCH1.3
TXD
  Top 0.305: ATMEGA328P.31 91.42,30.21 95.47,26.16 95.47,24.13 96.23,23.37 J9.4
TXD1
  Top 0.305: ATMEGA328P1.31 91.3,80.12 95.34,76.07 95.34,74.04 96.1,73.28 J16.4

## Text on the board
tNames: SCL | SDA | 5V | GND | D5 | D4 | D3 | D1 | D0 | A7 | A6 | SCL | SDA | 5V | GND | D5 | D4 | D3 | D1 | D0 | A7 | A6
bNames: for more info / get into my github | ReflowOven v2.0 / Designed by / Royce Richmond | also hi :D | for more info / get into my github | ReflowOven v2.0 / Designed by / Royce Richmond | also hi :D